# EAGLE board circuito_tesi (EAGLE 9.6.2)

Size 100 x 80 mm. Coordinates in mm from the lower left corner, seen from the top.
Outline: 0,0 100,0 100,80 0,80 0,0
Copper layers (1*16): Top 0.035mm / dielectric 1.5mm / Bottom 0.035mm
Design rules "default": minimum track width 6mil, minimum drill 0.35mm, track to track 6mil, track to pad 6mil, pad to pad 6mil, via to via 6mil, smd to smd 6mil, copper to edge 40mil, drill to drill 6mil, minimum pad ring 10mil, minimum via ring 8mil, stop-mask expansion 4mil, vias tented up to drill 0mil, thermal gap 10mil

## Footprints (pad centres in the part's own frame; a part is rotated, then mirrored left to right if it is on the bottom)
SPARKFUN_LOGIC_LEVEL_CONVERTER = drill 1.016 pad 1.88: GND1 -5.08,-1.27; GND2 5.08,-1.27; HV 5.08,1.27; HV1 5.08,6.35; HV2 5.08,3.81; HV3 5.08,-3.81; HV4 5.08,-6.35; LV -5.08,1.27; LV1 -5.08,6.35; LV2 -5.08,3.81; LV3 -5.08,-3.81; LV4 -5.08,-6.35
BAT_2996TR = smd 3.96 x 3.96: - 0,0 | smd 3.18 x 3.18: S+1 -7.3,0; S+2 7.3,0
CAPC0603X33N = smd 0.38 x 0.4: 1 -0.281,0; 2 0.281,0
CAPC1005X55N = smd 0.54 x 0.6: 1 -0.43,0; 2 0.43,0
CAPC0603X55N = smd 0.41 x 0.42: 1 -0.278,0; 2 0.278,0
CAPC0603X35N = smd 0.38 x 0.4: 1 -0.28,0; 2 0.28,0
P47F-BOTTOM = smd 2.6 x 2.6: A -2.45,0; C 2.45,0 | hole 2.3: 0,0
RESC2012X60N = smd 1.2 x 1.42: 1 -0.835,0; 2 0.835,0
RESC1508X55N = smd 0.9 x 0.97: 1 -0.76,0; 2 0.76,0
RESC2012X65N = smd 1 x 1.42: 1 -0.935,0; 2 0.935,0
RES_ERA6VEB8200V = smd 1.15 x 1.15: 1 -1.175,0; 2 1.175,0
RESC1508X55N' = smd 0.87 x 0.93: 1 -0.755,0; 2 0.755,0
SW_GF-123-0054 = drill 1.75 square: 1 -4.6,1.09 | drill 1.75: 2 0,1.09
SCD4X_SCD4X = drill 0.127 pad 0.254: 6 0,0; 7 7.62,0; 9 5.08,0; 10 3.81,0; 19 2.54,0; 20 1.27,0; 21 6.35,0
MA05-1 = drill 1.016 long: 1 -5.08,0; 2 -2.54,0; 3 0,0; 4 2.54,0; 5 5.08,0
QFN48-6X6MM = smd 0.68 x 0.23: 1 -2.86,2.2; 2 -2.86,1.8; 3 -2.86,1.4; 4 -2.86,1; 5 -2.86,0.6; 6 -2.86,0.2; 7 -2.86,-0.2; 8 -2.86,-0.6; 9 -2.86,-1; 10 -2.86,-1.4; 11 -2.86,-1.8; 12 -2.86,-2.2; 25 2.86,-2.2; 26 2.86,-1.8; 27 2.86,-1.4; 28 2.86,-1; 29 2.86,-0.6; 30 2.86,-0.2; 31 2.86,0.2; 32 2.86,0.6; 33 2.86,1; 34 2.86,1.4; 35 2.86,1.8; 36 2.86,2.2 | smd 0.23 x 0.68: 13 -2.2,-2.86; 14 -1.8,-2.86; 15 -1.4,-2.86; 16 -1,-2.86; 17 -0.6,-2.86; 18 -0.2,-2.86; 19 0.2,-2.86; 20 0.6,-2.86; 21 1,-2.86; 22 1.4,-2.86; 23 1.8,-2.86; 24 2.2,-2.86; 37 2.2,2.86; 38 1.8,2.86; 39 1.4,2.86; 40 1,2.86; 41 0.6,2.86; 42 0.2,2.86; 43 -0.2,2.86; 44 -0.6,2.86; 45 -1,2.86; 46 -1.4,2.86; 47 -1.8,2.86; 48 -2.2,2.86 | smd 4.6 x 4.6: EP 0,0
SGP30 = smd 0.55 x 0.4: 1 -1.15,0.8; 2 -1.15,0; 3 -1.15,-0.8; 4 1.15,-0.8; 5 1.15,0; 6 1.15,0.8 | smd 0.305 x 0.61: DIEPAD 0,0
SENSOR_MICS-6814 = smd 1.5 x 0.6: A -2.25,1.25; B -2.25,0; C -2.25,-1.25; F 2.25,-1.25; G 2.25,0; H 2.25,1.25 | smd 0.6 x 1.5: D -1.27,-3.25; E 1.27,-3.25; J 1.27,3.25; K -1.27,3.25
DIP794W45P254L959H508Q8 = drill 0.78 pad 1.13 square: 1 -3.97,3.81 | drill 0.78 pad 1.13: 2 -3.97,1.27; 3 -3.97,-1.27; 4 -3.97,-3.81; 5 3.97,-3.81; 6 3.97,-1.27; 7 3.97,1.27; 8 3.97,3.81
PSON65P250X250X100-8N = smd 0.49 x 0.45: 1 0.97,0.975; 2 0.97,0.325; 3 0.97,-0.325; 4 0.97,-0.975; 5 -0.97,-0.975; 6 -0.97,-0.325; 7 -0.97,0.325; 8 -0.97,0.975
PQFN50P300X300X100-16N = smd 0.52 x 0.35: 1 -1.225,1; 2 -1.225,0.5; 3 -1.225,0; 4 -1.225,-0.5; 5 -1.225,-1; 9 1.225,-1; 10 1.225,-0.5; 11 1.225,0; 12 1.225,0.5; 13 1.225,1 | smd 0.35 x 0.52: 6 -0.5,-1.225; 7 0,-1.225; 8 0.5,-1.225; 14 0.5,1.225; 15 0,1.225; 16 -0.5,1.225
SOT230P700X180-4N = smd 1.97 x 0.89: 1 -3.025,2.3; 2 -3.025,0; 3 -3.025,-2.3 | smd 1.97 x 3.19: 4 3.025,0
SOT230P700X180-4N' = smd 2.15 x 1: 1 -2.9,2.3; 2 -2.9,0; 3 -2.9,-2.3 | smd 2.15 x 3.25: 4 2.9,0
SOT223_STM-L = smd 0.85 x 1.245: 1 -2.3,-3.175; 2 0,-3.175; 3 2.3,-3.175 | smd 3.15 x 1.245: 4 0,3.175

## Placement (x,y rotation side)
B1  SPARKFUN_LOGIC_LEVEL_CONVERTER  [SPARKFUN_LOGIC_LEVEL_CONVERTER]  -71.12,8.89 0 top  (outside the outline)
B2  SPARKFUN_LOGIC_LEVEL_CONVERTER  [SPARKFUN_LOGIC_LEVEL_CONVERTER]  -21.59,30.48 0 top  (outside the outline)
BT1  2996TR  [BAT_2996TR]  -39.37,30.48 0 top  (outside the outline)
BT2  2996TR  [BAT_2996TR]  -58.42,30.48 0 top  (outside the outline)
BT3  2996TR  [BAT_2996TR]  -22.86,49.53 0 top  (outside the outline)
BT4  2996TR  [BAT_2996TR]  -41.91,49.53 0 top  (outside the outline)
C1  GRM033C80J104KE15D  [CAPC0603X33N]  -102.87,-41.91 0 top  (outside the outline)
C2  CL05A106MP5NUNC  [CAPC1005X55N]  -106.68,-40.64 0 top  (outside the outline)
C3  GRM035R60G475ME15D  [CAPC0603X55N]  -106.68,-44.45 0 top  (outside the outline)
C4  GRM033R60J105MEA2D  [CAPC0603X35N]  -106.68,-46.99 0 top  (outside the outline)
C5  GRM033R60J105MEA2D  [CAPC0603X35N]  -106.68,-49.53 0 top  (outside the outline)
C6  GRM035R60G475ME15D  [CAPC0603X55N]  -106.68,-52.07 0 top  (outside the outline)
C7  GRM033C80J104KE15D  [CAPC0603X33N]  -20.32,85.09 0 top  (outside the outline)
C8  GRM033R60J103KA01D  [CAPC0603X33N]  -66.04,81.28 0 top  (outside the outline)
C9  GRM033R60J103KA01D  [CAPC0603X33N]  -74.93,81.28 0 top  (outside the outline)
LED1  LAP4-BOTTOM  [P47F-BOTTOM]  -57.15,60.96 0 top  (outside the outline)
R1  RNCP0805FTD10K0  [RESC2012X60N]  -76.2,-2.54 0 top  (outside the outline)
R2  RNCP0805FTD10K0  [RESC2012X60N]  -76.2,-6.35 0 top  (outside the outline)
R3  RMCF0603FT10M0  [RESC1508X55N]  -54.61,74.93 0 top  (outside the outline)
R4  RMCF0603FT10M0  [RESC1508X55N]  -62.23,74.93 0 top  (outside the outline)
R5  RMCF0603FT5M10  [RESC1508X55N]  -69.85,74.93 0 top  (outside the outline)
R6  RMCF0603FT5M10  [RESC1508X55N]  -77.47,74.93 0 top  (outside the outline)
R7  RP73PF2A130RBTDF  [RESC2012X65N]  -82.55,-10.16 0 top  (outside the outline)
R8  ERA6VEB8200V  [RES_ERA6VEB8200V]  -76.2,-11.43 0 top  (outside the outline)
R9  RNCF0603DTE820R  [RESC1508X55N']  -82.55,-15.24 0 top  (outside the outline)
S1  GF-123-0054  [SW_GF-123-0054]  -59.69,48.26 0 top  (outside the outline)
SCD4X  SCD4XSCD4X_SCD4X_SCD4X  [SCD4X_SCD4X]  -30.48,85.09 0 top  (outside the outline)
SPS30  [MA05-1]  -68.58,60.96 0 top  (outside the outline)
U1  NRF52832  [QFN48-6X6MM]  -43.18,62.23 0 top  (outside the outline)
U2  SGP30  [SGP30]  -22.86,76.2 0 top  (outside the outline)
U3  MICS-6814  [SENSOR_MICS-6814]  -22.86,64.77 0 top  (outside the outline)
U4  OPA2277PA  [DIP794W45P254L959H508Q8]  -34.29,64.77 0 top  (outside the outline)
U6  BME280  [PSON65P250X250X100-8N]  -31.75,74.93 0 top  (outside the outline)
U7  LIS3DH  [PQFN50P300X300X100-16N]  -26.67,76.2 0 top  (outside the outline)
V_REG_1.8  MCP1825S-1802E/DB  [SOT230P700X180-4N]  -90.17,-10.16 0 top  (outside the outline)
V_REG_3.3  LD1117S33TR  [SOT230P700X180-4N']  -100.33,-10.16 0 top  (outside the outline)
V_REG_5  LDL1117S50RSOT223_STM-L  [SOT223_STM-L]  -83.82,-25.4 0 top  (outside the outline)

## Library data of the parts
B1 B2 = SparkFun-Boards
BT1-BT4 = Battery_holder; DESCRIPTION: SMT Holder for 11.6mm Cell-Tin Nickel Plated on T&R; DIGI-KEY_PART_NUMBER: 36-2996TR-ND; MF: Keystone Electronics; MP: 2996TR; PACKAGE: None; PURCHASE-URL: https://pricing.snapeda.com/search/part/2996TR/?ref=eda
C1 C7 = Condens_100nF; DESCRIPTION: SMD capacitor X6S(EIA) with capacitance 0.10uF Tol.10%. Rated voltage 6.3Vdc 105C; DIGI-KEY_PART_NUMBER: 490-10390-2-ND; MF: Murata Electronics; MP: GRM033C80J104KE15D; PACKAGE: 0603 Taiyo Yuden; PURCHASE-URL: https://pricing.snapeda.com/search/part/GRM033C80J104KE15D/?ref=eda
C2 = Condens_10uF; DESCRIPTION: 10 µF ±20% 10V Ceramic Capacitor X5R 0402 (1005 Metric); DIGI-KEY_PART_NUMBER: 1276-1450-2-ND; MF: Samsung; MP: CL05A106MP5NUNC; PACKAGE: 0402 Samsung; PURCHASE-URL: https://pricing.snapeda.com/search/part/CL05A106MP5NUNC/?ref=eda
C3 C6 = Condens_4.7uF; DESCRIPTION: SMD capacitor X5R(EIA) with capacitance 4.7uF Tol.20%. Rated voltage 4Vdc 85C; DIGI-KEY_PART_NUMBER: 490-13229-2-ND; MF: Murata; MP: GRM035R60G475ME15D; PACKAGE: 0603 Murata; PURCHASE-URL: https://pricing.snapeda.com/search/part/GRM035R60G475ME15D/?ref=eda
C4 C5 = Condens_1uF; DESCRIPTION: SMD capacitor X5R(EIA) with capacitance 1.0uF Tol.20%. Rated voltage 6.3Vdc 85C; DIGI-KEY_PART_NUMBER: 490-7229-2-ND; MF: Murata; MP: GRM033R60J105MEA2D; PACKAGE: 0603 Taiyo Yuden; PURCHASE-URL: https://pricing.snapeda.com/search/part/GRM033R60J105MEA2D/?ref=eda
C8 C9 = Condens_10nF; DESCRIPTION: SMD capacitor X5R(EIA) with capacitance 10000pF Tol.10%. Rated voltage 6.3Vdc 85C; DIGI-KEY_PART_NUMBER: 490-5403-2-ND; MF: Murata; MP: GRM033R60J103KA01D; PACKAGE: 0603 Taiyo Yuden; PURCHASE-URL: https://pricing.snapeda.com/search/part/GRM033R60J103KA01D/?ref=eda
LED1 = led
R1 R2 = Res_10K_0p25W; DESCRIPTION: 10 kOhms ±1% 0.25W, 1/4W Chip Resistor 0805 (2012 Metric) Anti-Sulfur, Moisture Resistant Thin Film; DIGI-KEY_PART_NUMBER: RNCP0805FTD10K0TR-ND; MF: Stackpole Electronics Inc; MP: RNCP0805FTD10K0; PACKAGE: 2012 Stackpole; PURCHASE-URL: https://pricing.snapeda.com/search/part/RNCP0805FTD10K0/?ref=eda
R3 R4 = Res_10MOHM_2; DESCRIPTION: 10 MOhms ±1% 0.1W, 1/10W Chip Resistor 0603 (1608 Metric) Automotive AEC-Q200 Thick Film; DIGI-KEY_PART_NUMBER: RMCF0603FT10M0TR-ND; MF: Stackpole Electronics Inc; MP: RMCF0603FT10M0; PACKAGE: 1508 Stackpole; PURCHASE-URL: https://pricing.snapeda.com/search/part/RMCF0603FT10M0/?ref=eda
R5 R6 = Res_5.1MOHM; DESCRIPTION: 5.1 MOhms ±1% 0.1W, 1/10W Chip Resistor 0603 (1608 Metric) Automotive AEC-Q200 Thick Film; DIGI-KEY_PART_NUMBER: RMCF0603FT5M10TR-ND; MF: Stackpole Electronics Inc; MP: RMCF0603FT5M10; PACKAGE: 1508 Stackpole; PURCHASE-URL: https://pricing.snapeda.com/search/part/RMCF0603FT5M10/?ref=eda
R7 = Res_130_0p25; DESCRIPTION: Surface Mount Thin Film Resistor, RP73 Series, 130 ohm, 250 mW, - 0.1%, 150 V; MF: TE Connectivity; MP: RP73PF2A130RBTDF; PACKAGE: 0805 TE Connectivity; PURCHASE-URL: https://pricing.snapeda.com/search/part/RP73PF2A130RBTDF/?ref=eda
R8 = Res_820_0p25W; DESCRIPTION: Thin Film Chip Resistors, High Stability and Reliability Type, ERA6V Series, 0.82K Ohm +/-0.1% , 0.25W , 0805 size , chip resistor (2 x 1.25 x 0.55mm); DIGI-KEY_PART_NUMBER: 10-ERA-6VEB8200VTR-ND; MF: Panasonic; MP: ERA6VEB8200V; PACKAGE: 2012-2 Panasonic; PURCHASE-URL: https://pricing.snapeda.com/search/part/ERA6VEB8200V/?ref=eda
R9 = Res_820OHM; DESCRIPTION: 820 ±0.5% 0.1W, 1/10W Chip Resistor 0603 (1608 Metric) Automotive AEC-Q200 Thin Film; DIGI-KEY_PART_NUMBER: RNCF0603DTE820RTR-ND; MF: Stackpole Electronics Inc; MP: RNCF0603DTE820R; PACKAGE: 1508 Stackpole; PURCHASE-URL: https://pricing.snapeda.com/search/part/RNCF0603DTE820R/?ref=eda
S1 = GF-123-0054; DESCRIPTION: Slide Switch SPST Through Hole; DIGI-KEY_PART_NUMBER: CWI333-ND; MF: CW Industries; MP: GF-123-0054; PACKAGE: None; PURCHASE-URL: https://pricing.snapeda.com/search/part/GF-123-0054/?ref=eda
SCD4X = SCD41-D-R1
SPS30 = con-lstb; OC_FARNELL: unknown; OC_NEWARK: unknown
U1 = SparkFun-RF; PROD_ID: IC-13460
U2 = SGP30; AVAILABILITY: In Stock; DESCRIPTION: SGP30, SHTC1 Air Quality, Humidity, Temperature Sensor Arduino Platform Evaluation Expansion Board; MF: Sensirion AG; MP: SGP30; PACKAGE: None; PRICE: None; PURCHASE-URL: https://pricing.snapeda.com/search/part/SGP30/?ref=eda
U3 = MICS-6814; AVAILABILITY: Not in stock; DESCRIPTION: MiCS-6814 Air Quality Sensor mikroBUS™ Click™ Platform Evaluation Expansion Board; MF: MikroElektronika; MP: MICS-6814; PACKAGE: None; PRICE: None
U4 = OPA2277PA; DESCRIPTION: 10µV, 0.1µV/˚C, High-Precision, Low-Power Operational Amplifier; DIGI-KEY_PART_NUMBER: OPA2277PA-ND; MF: Texas Instruments; MP: OPA2277PA; PACKAGE: PDIP-8 Texas; PURCHASE-URL: https://pricing.snapeda.com/search/part/OPA2277PA/?ref=eda
U6 = BME280; AVAILABILITY: In Stock; DESCRIPTION: Board Mount Humidity Sensors MEMS humidity, pressure and temperature sensor; MF: Bosch; MP: BME280; PACKAGE: LGA-8 Bosch; PRICE: None; PURCHASE-URL: https://pricing.snapeda.com/search/part/BME280/?ref=eda
U7 = LIS3DH; DESCRIPTION: Accelerometer X, Y, Z Axis ±2g, 4g, 8g, 16g 0.5Hz ~ 625Hz 16-LGA (3x3); DIGI-KEY_PART_NUMBER: 497-10610-ND; MF: STMicroelectronics; MP: LIS3DH; PACKAGE: LGA-16 STMicroelectronics; PURCHASE-URL: https://pricing.snapeda.com/search/part/LIS3DH/?ref=eda
V_REG_1.8 = V_Reg_1.8_SMD; DESCRIPTION: Linear Voltage Regulator IC Positive Fixed 1 Output 500mA SOT-223-3; DIGI-KEY_PART_NUMBER: MCP1825S-1802E/DB-ND; MF: Microchip; MP: MCP1825S-1802E/DB; PACKAGE: SOT-223 Microchip Technology; PURCHASE-URL: https://pricing.snapeda.com/search/part/MCP1825S-1802E/DB/?ref=eda
V_REG_3.3 = V_Reg_3.3_SMD; DESCRIPTION: Linear Voltage Regulator IC Positive Fixed 1 Output 800mA SOT-223; DIGI-KEY_PART_NUMBER: 497-1242-2-ND; MF: STMicroelectronics; MP: LD1117S33TR; PACKAGE: TO-261-4 STMicroelectronics; PURCHASE-URL: https://pricing.snapeda.com/search/part/LD1117S33TR/?ref=eda
V_REG_5 = V_Reg_5_SMD; COPYRIGHT: Copyright (C) 2022 Ultra Librarian. All rights reserved.; DIGI-KEY_PART_NUMBER_1: 497-17240-1-ND; DIGI-KEY_PART_NUMBER_2: 497-17240-2-ND; DIGI-KEY_PART_NUMBER_3: 497-17240-6-ND; MANUFACTURER_PART_NUMBER: LDL1117S50R; MFR_NAME: STMicroelectronics

## Nets
1.8V: B2.LV C5.2 C7.1 U2.1 U2.5 U7.1 U7.8 U7.14 V_REG_1.8.3
3.3: B1.LV B2.HV C2.1 R1.2 R2.2 SCD4X.7 SCD4X.19 U1.13 U1.36 U1.48 U6.2 U6.6 U6.8 V_REG_3.3.2 V_REG_3.3.4
5V: B1.HV C3.2 C6.2 R7.2 R8.2 SPS30.1 U4.8 V_REG_1.8.1 V_REG_5.4
GND: B1.GND1 B1.GND2 B2.GND1 B2.GND2 BT4.- C1.1 C2.2 C3.1 C4.1 C5.1 C6.1 C7.2 C8.1 C9.1 R3.1 R4.1 R9.1 SCD4X.21 SPS30.4 SPS30.5 U2.2 U2.4 U2.DIEPAD U3.B U3.J U4.4 U6.1 U6.5 U6.7 U7.5 U7.7 U7.10 U7.12 V_REG_1.8.2 V_REG_1.8.4 V_REG_3.3.1 V_REG_5.1
N$1: B1.HV3 SPS30.2
N$2: BT1.- BT2.S+1 BT2.S+2
N$3: B1.HV4 SPS30.3
N$4: BT2.- BT3.S+1 BT3.S+2
N$5: BT3.- BT4.S+1 BT4.S+2
N$6: U3.A U4.5
N$7: R6.2 U4.6 U4.7
N$9: LED1.C R9.2
N$10: U3.H U4.3
N$11: R8.1 U3.G
N$13: R7.1 U3.K
N$15: C9.2 R4.2 R6.1 U1.5
N$17: C8.2 R3.2 R5.2 U1.7
N$19: BT1.S+1 BT1.S+2 S1.1
N$20: B2.LV3 U2.3 U7.6
N$21: LED1.A U1.28
N$22: R5.1 U4.1 U4.2
N$23: B2.LV4 U2.6 U7.4
SCL: B1.LV4 B2.HV4 R2.1 SCD4X.9 U1.22 U6.4
SDA: B1.LV3 B2.HV3 R1.1 SCD4X.10 U1.21 U6.3
VDD: C1.2 C4.2 S1.2 V_REG_3.3.3 V_REG_5.3
VSS: SCD4X.6 SCD4X.20

## Tracks (layer width: path | path; a pad name or v marks a point on that pad's centre or on a via)
1.8V  (8 unrouted)
3.3  (14 unrouted)
5V  (8 unrouted)
GND  (36 unrouted)
N$1  (1 unrouted)
N$2  (2 unrouted)
N$3  (1 unrouted)
N$4  (2 unrouted)
N$5  (2 unrouted)
N$6  (1 unrouted)
N$7  (2 unrouted)
N$9  (1 unrouted)
N$10  (1 unrouted)
N$11  (1 unrouted)
N$13  (1 unrouted)
N$15  (3 unrouted)
N$17  (3 unrouted)
N$19  (2 unrouted)
N$20  (2 unrouted)
N$21  (1 unrouted)
N$22  (2 unrouted)
N$23  (2 unrouted)
SCL  (5 unrouted)
SDA  (5 unrouted)
VDD  (4 unrouted)
VSS  (1 unrouted)